# Altium PCB Headstage_Mainboard.PcbDoc
Units mil, origin at the board's own origin, x right, y up, seen from the top; angles counter-clockwise.
Board outline 4600 x 5400 mil, 4 copper layers (Top Copper Layer, Internal Copper Layer 1, Internal Copper Layer 2, Bottom Copper Layer), stack 62.205 mil thick; 8 components, 96 nets, 220 pads, 19 vias.
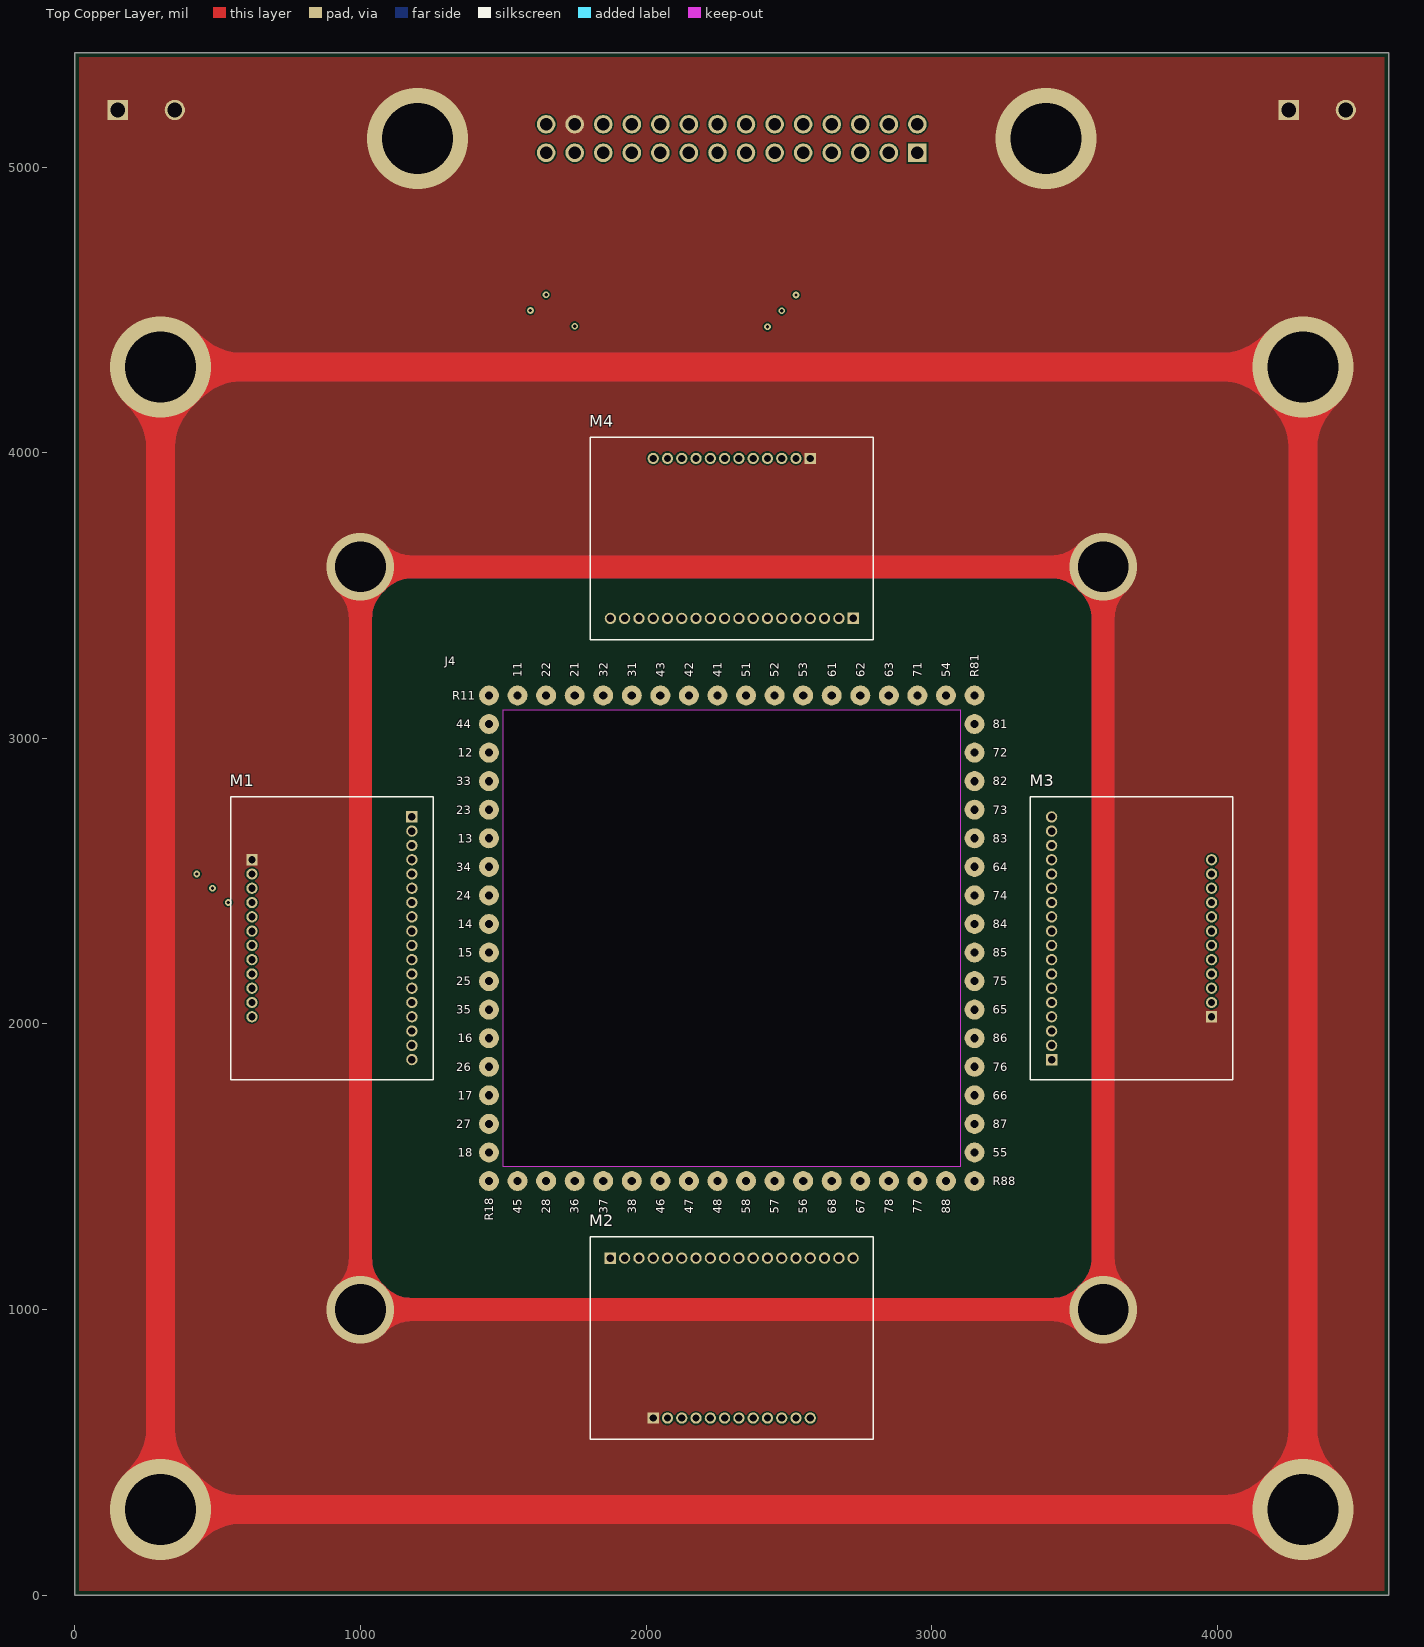
[diagram p0: Top Copper Layer view]
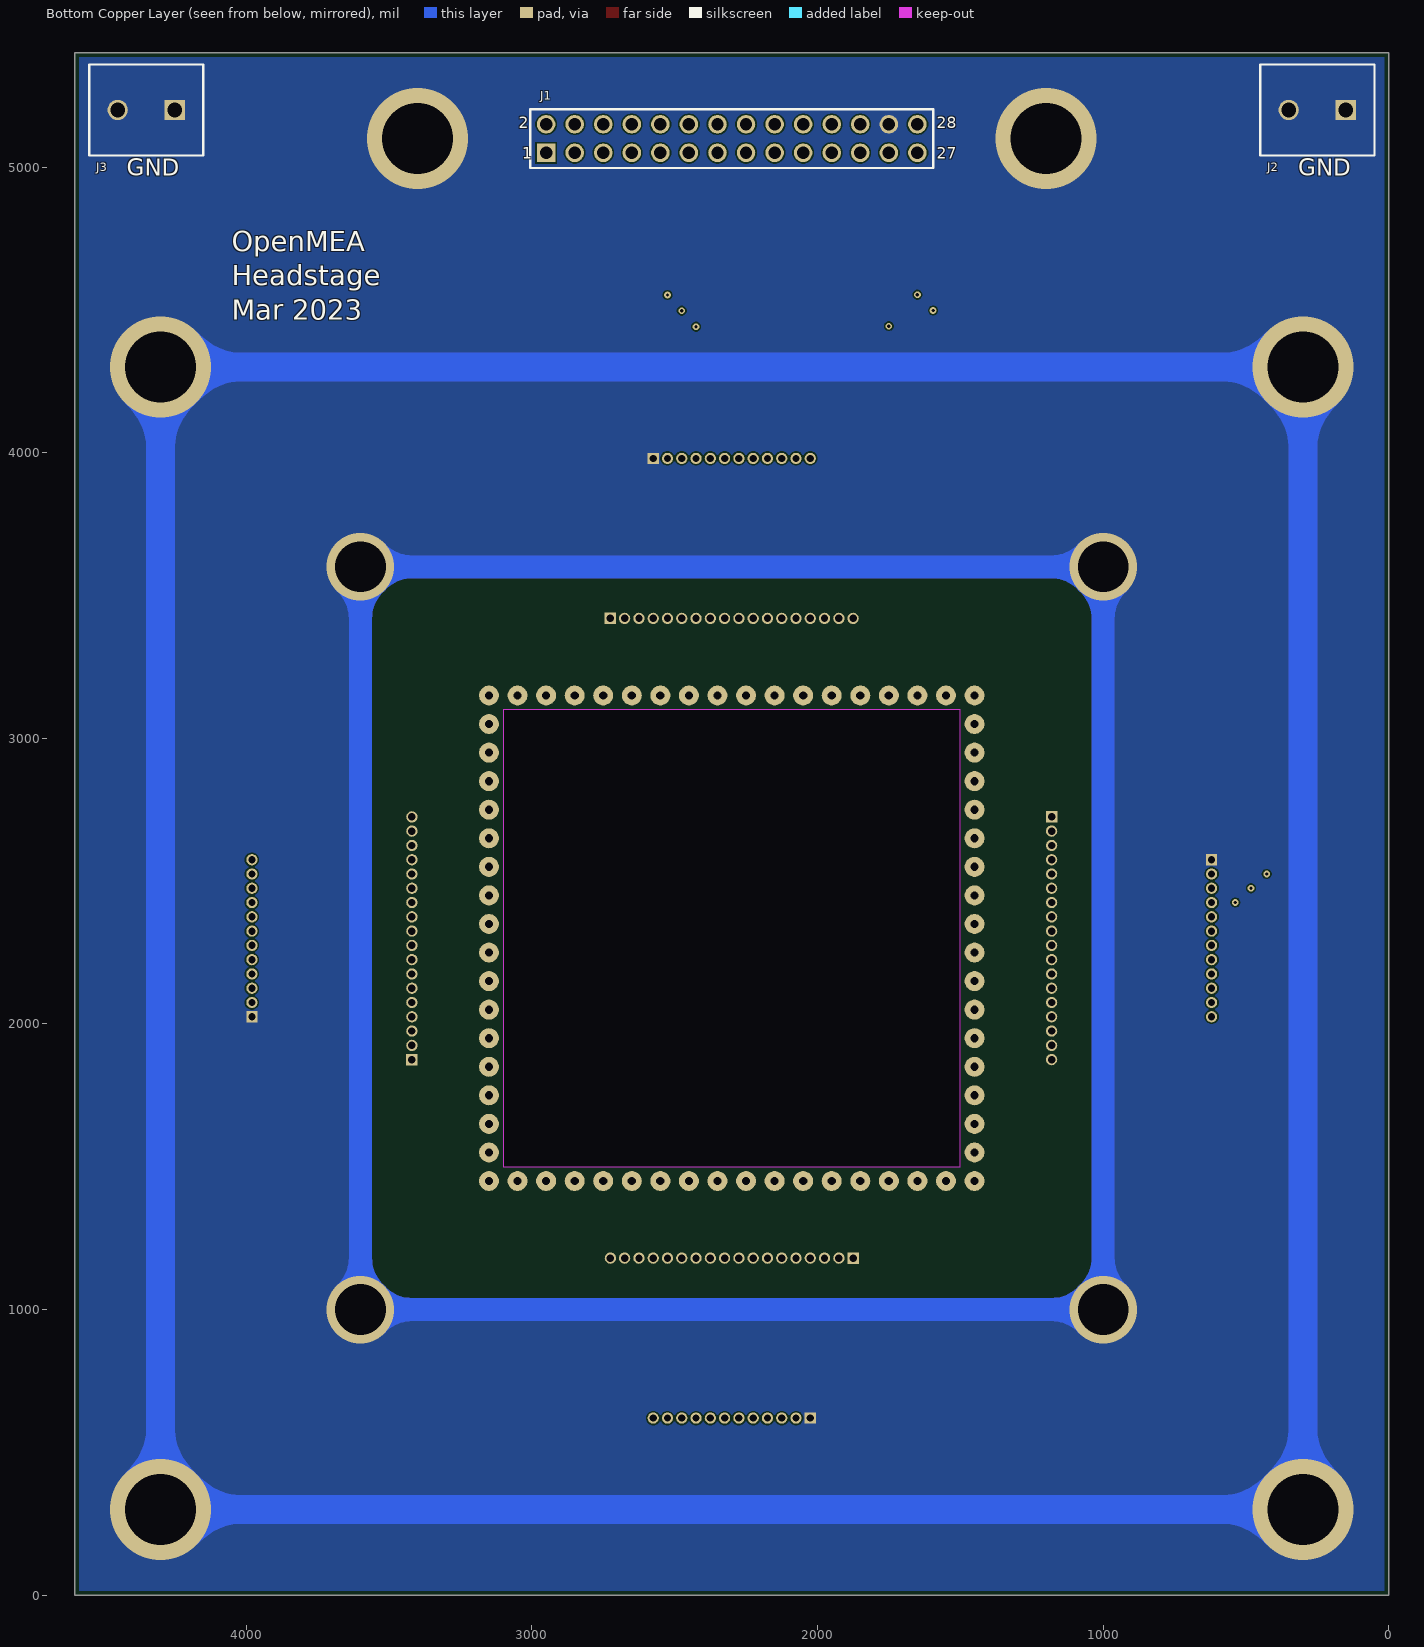
[diagram p1: Bottom Copper Layer view, seen from below]
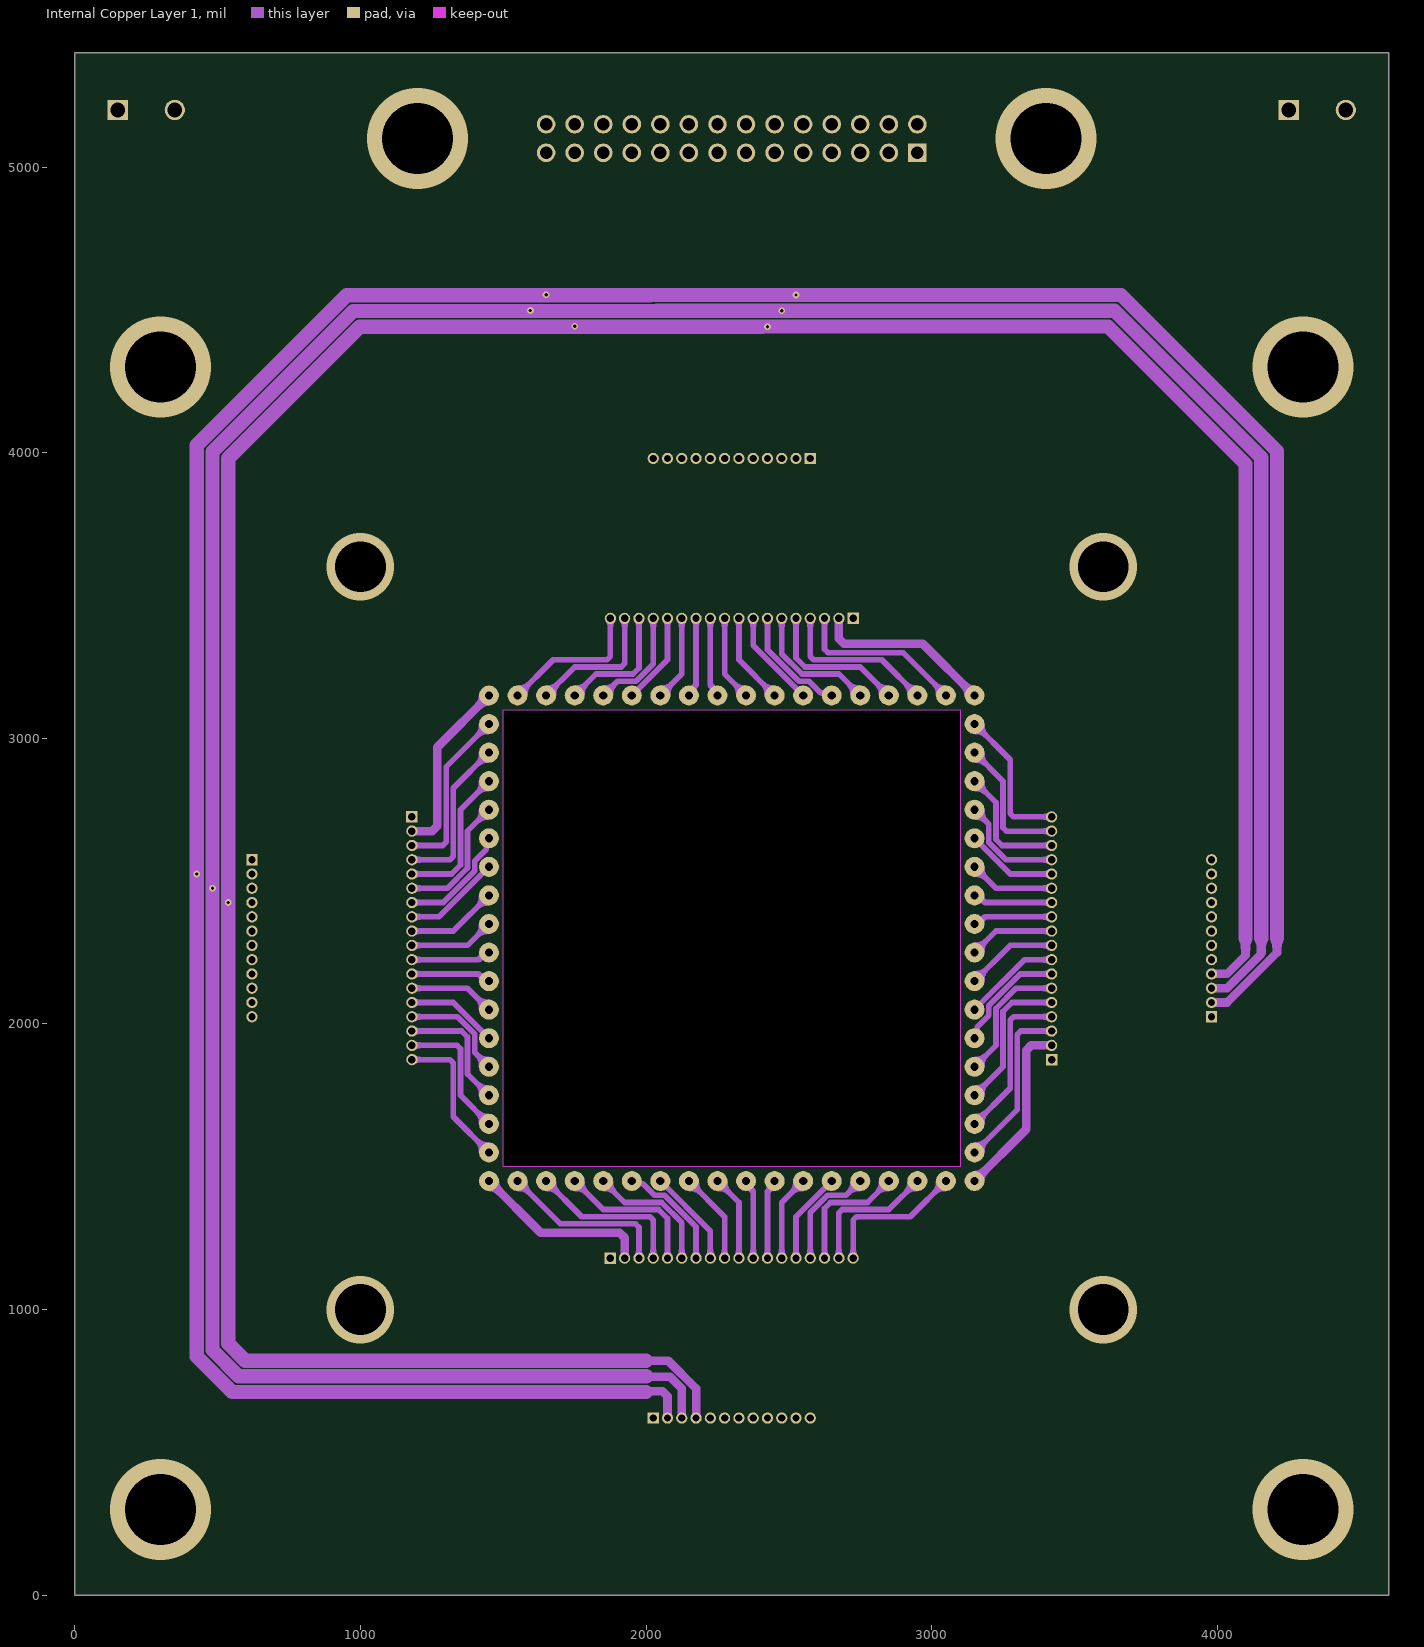
[diagram p2: Internal Copper Layer 1]
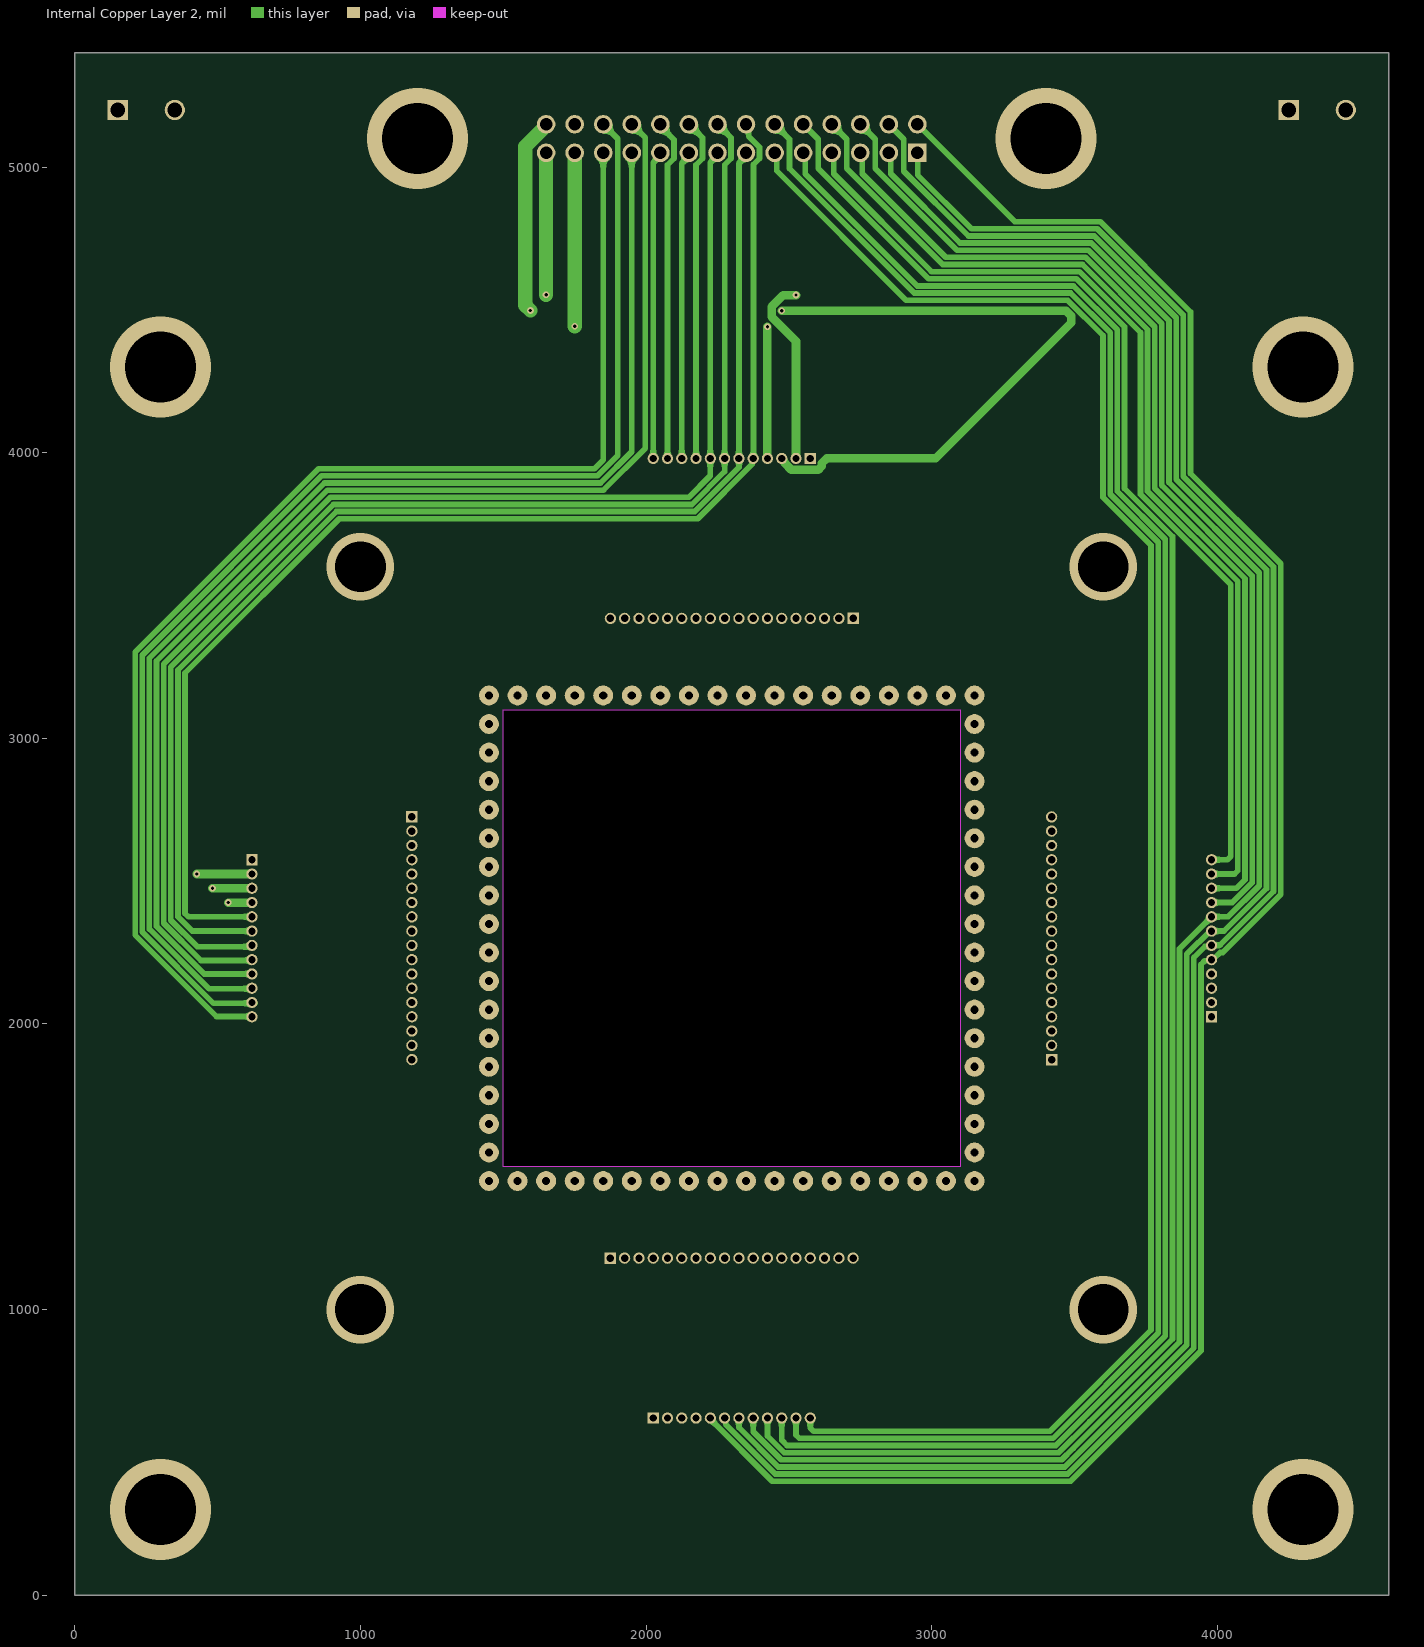
[diagram p3: Internal Copper Layer 2]

## Layer stack, top to bottom
Top Solder: solder mask 0.3937, Solder Resist, Dk 3.5
Top Copper Layer: signal copper 1.378
Dielectric 1: prepreg 8.6614, FR-4, Dk 4.2
Internal Copper Layer 1: signal copper 1.378
Dielectric 2: core 39.3701, FR-4, Dk 4.2
Internal Copper Layer 2: signal copper 1.378
Dielectric 3: prepreg 8.6614, FR-4, Dk 4.2
Bottom Copper Layer: signal copper 1.378
Bottom Solder: solder mask 0.3937, Solder Resist, Dk 3.5

## Board outline
0,0 4600,0 4600,5400 0,5400
cut-out: 1500,3100 3100,3100 3100,1500 1500,1500

## Design rules (kind name [scope] priority, off if disabled: settings)
BoardOutlineClearance [All] p1: gap=15 ignorepadtopadclearanceinfootprint=FALSE
Clearance [All] p1: gap=5 ignorepadtopadclearanceinfootprint=TRUE
ComponentClearance [All] p1: gap=5.91 collisioncheckmode=3 verticalgap=5.91 showdistances=FALSE
HoleSize [All] p1: absolutevalues=TRUE maxlimit=248.03 minlimit=9.84 maxpercent=80.000 minpercent=20.000
HoleToHoleClearance [All] p1: gap=17.72 allowstackedmicrovias=TRUE
MinimumAnnularRing [All] p1: minimumring=5.91
MinimumSolderMaskSliver [All] p1: minsoldermaskwidth=5.9
PlaneClearance [All] p1: clearance=5.91
PlaneConnect [All] p1: planeconnectstyle=Relief reliefexpansion=9.84 reliefentries=4 reliefconductorwidth=5.91 reliefairgap=5.91
PolygonConnect [All] p1: connectstyle=Direct reliefconductorwidth=5.91 reliefentries=4 polygonreliefangle="90 Angle" airgapwidth=5.91
RoomDefinition Headstage_Mainboard [InComponentClass('Headstage_Mainboard')] p1 off: confinementstyle=ConfineIn formatcopy=TRUE lockcomponents=FALSE outline 0,0 2000,0 2000,1000 0,1000
RoutingVias [All] p1: holewidth=9.84 width=21.65 viastyle="Through Hole" minholewidth=9.84 minwidth=21.65 maxholewidth=248.03 maxwidth=354.33
SilkToSilkClearance [All] p1: silktosilkclearance=5
SilkToSolderMaskClearance [IsPad] p1: minsilkscreentomaskgap=7.87 clearancetoexposedcopper=TRUE
SolderMaskExpansion [All] p1: expansion=0 istentingtop=FALSE
Width [All] p1: maxlimit=1968.5 minlimit=5.91 preferedwidth=5.91
22 further rules are at their usual default settings.

## Components (designator, comment, footprint, x,y, rotation, side; value= is the part's Value field where it differs from the comment)
J1 "61302821121" 61302821121 2300,5100 r180 bottom
J2 "1729128" PHOE-1729128-2_V 250,5200 r0 bottom
J3 "1729128" PHOE-1729128-2_V 4350,5200 r0 bottom
J4 "Pogo_Pins_64_4" Pogo_Pins_64_4 2300,2300 r0 top locked
M1 "Neural_Interface_Board" Neural_Interface_Board 900,2300 r270 top locked
M2 "Neural_Interface_Board" Neural_Interface_Board 2300,900 r0 top locked
M3 "Neural_Interface_Board" Neural_Interface_Board 3700,2300 r90 top locked
M4 "Neural_Interface_Board" Neural_Interface_Board 2300,3700 r180 top locked

## Footprints (in the part's own frame and the unit in brackets; to place one, negate y for a bottom-side part, rotate by r counter-clockwise, add the part's x,y. Pads: shape width x height; smd on the part's side, far side on the other; paste and mask are expansions set on the pad)
61302821121 [mm] "Pin Header, pitch 2.54 mm, THT, Vertical, dual row, 28p"
  rect 1.65x1.65 hole 1.1: 1(-16.51,-1.27)
  round 1.65 hole 1.1: 2(-16.51,1.27) 3(-13.97,-1.27) 4(-13.97,1.27) 5(-11.43,-1.27) 6(-11.43,1.27) 7(-8.89,-1.27) 8(-8.89,1.27) 9(-6.35,-1.27) 10(-6.35,1.27) 11(-3.81,-1.27) 12(-3.81,1.27) 13(-1.27,-1.27) 14(-1.27,1.27) 15(1.27,-1.27) 16(1.27,1.27) 17(3.81,-1.27) 18(3.81,1.27) 19(6.35,-1.27) 20(6.35,1.27) 21(8.89,-1.27) 22(8.89,1.27) 23(11.43,-1.27) 24(11.43,1.27) 25(13.97,-1.27) 26(13.97,1.27) 27(16.51,-1.27) 28(16.51,1.27)
  silkscreen extent -17.93,-2.62 17.93,2.62, body extent -17.78,-2.54 17.78,2.54, height 8.59
Neural_Interface_Board [mm]
  rect 1x1 hole 0.65: 1(-6.985,-7.112) 13(-10.795,7.112)
  round 1 hole 0.65: 2(-5.715,-7.112) 3(-4.445,-7.112) 4(-3.175,-7.112) 5(-1.905,-7.112) 6(-0.635,-7.112) 7(0.635,-7.112) 8(1.905,-7.112) 9(3.175,-7.112) 10(4.445,-7.112) 11(5.715,-7.112) 12(6.985,-7.112) 14(-9.525,7.112) 15(-8.255,7.112) 16(-6.985,7.112) 17(-5.715,7.112) 18(-4.445,7.112) 19(-3.175,7.112) 20(-1.905,7.112) 21(-0.635,7.112) 22(0.635,7.112) 23(1.905,7.112) 24(3.175,7.112) 25(4.445,7.112) 26(5.715,7.112) 27(6.985,7.112) 28(8.255,7.112) 29(9.525,7.112) 30(10.795,7.112)
  silkscreen extent -12.6,-9 12.6,9, body extent -12.07,-8.51 12.07,8.51, height 3.9
PHOE-1729128-2_V [mm] "Receptacle, 2-Leads, Body 8.1x10.16mm, Pitch 5.08mm"
  rect 1.8x1.8 hole 1.3: 1(-2.54,0)
  round 1.8 hole 1.3: 2(2.54,0)
  silkscreen extent -5.08,-4.05 5.08,4.05, body extent -5.65,-4.05 5.08,4.05, height 10.01
Pogo_Pins_64_4 [mil]
  round 70 hole 29: 11(-750,850) 12(-850,650) 13(-850,350) 14(-850,50) 15(-850,-50) 16(-850,-350) 17(-850,-550) 18(-850,-750) 21(-550,850) 22(-650,850) 23(-850,450) 24(-850,150) 25(-850,-150) 26(-850,-450) 27(-850,-650) 28(-650,-850) 31(-350,850) 32(-450,850) 33(-850,550) 34(-850,250) 35(-850,-250) 36(-550,-850) 37(-450,-850) 38(-350,-850) 41(-50,850) 42(-150,850) 43(-250,850) 44(-850,750) 45(-750,-850) 46(-250,-850) 47(-150,-850) 48(-50,-850) 51(50,850) 52(150,850) 53(250,850) 54(750,850) 55(850,-750) 56(250,-850) 57(150,-850) 58(50,-850) 61(350,850) 62(450,850) 63(550,850) 64(850,250) 65(850,-250) 66(850,-550) 67(450,-850) 68(350,-850) 71(650,850) 72(850,650) 73(850,450) 74(850,150) 75(850,-150) 76(850,-450) 77(650,-850) 78(550,-850) 81(850,750) 82(850,550) 83(850,350) 84(850,50) 85(850,-50) 86(850,-350) 87(850,-650) 88(750,-850) R11(-850,850) R18(-850,-850) R81(850,850) R88(850,-850)
  body extent -886,-886 886,886, height 303

## Part data
J1: library part CMP-1502-01115-1, "THT Vertical Pin Header WR-PHD, Pitch 2.54 mm, Dual Row, 28 pins", Contact Resistance=20mOhm, Manufacturer="Wurth Elektronik", Operating Temperature=-40to105degC, Rated Current=3A, Withstanding Voltage=500VAC, Working Voltage=250VAC, Datasheet URL=https://katalog.we-online.de/em/datasheet/6130xx21121.pdf, Gender=Male, Manufacturer URL=http://www.we-online.de, Mounting Technology=THT, Orientation=Vertical, Package Reference=61302821121, Packaging=Bag, Part Number=61302821121, Pin Number=28, Pitch=2.54mm, Publisher=WurthElektronik, Row Number=Dual
J2 J3: library part CMP-2000-05815-1, "PCB Terminal Block, 13.5 A, 400 V, 2-Pin THD, RoHS, Bulk", Current Rating=13500mA, Manufacturer="Phoenix Contact", Package Description="2-Pin Through Hole Device, Body 8.1 x 10.16 mm, Pitch 5.08 mm", Package Reference=1729128-2, Package Version=03/2015, Voltage Rating=400V, Datasheet URL=https://datasheet.ciiva.com/16046/1729128-16046181.pdf, Datasheet Version=12/2013, Manufacturer URL=http://www.phoenixcontact.com/, Mounting Technology=ThroughHole, No. of Positions=2, No. of Rows=1, Orientation=Horizontal, Package URL=https://www.phoenixcontact.com/online/portal/pi/pxc/product_detail_page/!ut/p/b1/3VdJjqNKFDxLH8AFycySyWY2ozFsEPOMMQaDOX1XedGL_1Vdm5YXJleknhSKeBkvI6EA8ncAo3AYoDhBQGco6KN7VURTdemj9us_IEKEZo_YHiPAEWEFmDGOHMORkqKYCORBZxgL7ZoaZYcbFFUZ3fqxSY6GOuxydWUuHqz1ynmMFygu583Bob0Ewr6Sd_l-5m-kAueHiB0jpRwZwe58wwtkpxtMYd_LmGcDRU02dRNEyWt6Y2ti5pSyJ_reIkzIulrqApdnbT11V5jnCKbYNCvhEM1MCpPByat_X379-iThf08CI5GfOPqfBeS3BRoBOdD55AKVv0iLwCMq-2BrzXWSGRH7pUGD9uwXQjiph3xL0DKQwdGa0JImiIOmBNOestqgwTHSSs2oOep-78apyXQBvNi8ZLaFjvjWvcaUEBu0MC6Wbe-d6mB0FAebo2lUWinqYaZs5DAYzV0RP9yitUjnGJ0iI9xhZkT42OCQNUJJhkgWINNQLP2JFP6OpMg3JCVg70jqHT0lvKOnhHf0lPuOnnLf0VPuWx6_dxwUIvwk5WMkT0kLL1mh61l2yZVSzG3pYV_bqo-mj6uMKwKwdnnW8Jh5RTOJzMOA5c-eJDaZQw4mTMPH02PvS_ZAqNVjVTo2WyYLkwH_KU1mmmG5kjRhDqPXLwwVHvVOjCM60-fpXvTDfMGW1PVFVS1r4e4yVDk4ZdNbkUHvqPqQSeian4UD39fNKmachqdJ1NJbyk8rXT9mXTvPk3oE5meulKGgiruPJek-4I9hTT6G8ZLOyRSm2RRVbThERQad5OS28hdt4YW4vG0stgYYzsWsK4_7y6DZMjJSCqri1kyiZR5vD7pwIrNR7QwPHTcLTI5qT7eRlpHrdGiupYlqQDJ7zy_CND8fWWBoLRXxk1RVcXiBQwbTD4Xi7KL-FuO94t9xaqweXzH, Packing=Bulk, PartNumber=1729128, Pitch=5.08mm, RoHS=TRUE
J4: "Pogo pins, 64 recording electrodes, 4 reference electrodes"

## Via types
v1: diameter 23.62, hole 11.81, Top Copper Layer to Bottom Copper Layer, tented both sides, 9 vias
v2: diameter 354.33, hole 248.03, Top Copper Layer to Bottom Copper Layer, 6 vias
v3: diameter 236.22, hole 177.17, Top Copper Layer to Bottom Copper Layer, 4 vias

## Nets (pads, with @x,y where several pads share a name; then routed paths per layer and width w, separated by ;. In a path a pad name is that pad's centre, name@x,y a point inside that pad or via, vN(x,y) a via of type N, cw(c..) or ccw(c..) an arc to the next point about the centre after c; other vN are vias at no path point)
E1_0: J4.44 M1.15 | length 600.3
  Internal Copper Layer 1 w20: M1.15 1288.28,2625 1300,2636.72 1300,2900 J4.44
E1_1: J4.12 M1.16 | length 564.9
  Internal Copper Layer 1 w20: M1.16 1313.28,2575 1325,2586.72 1325,2825 J4.12
E1_2: J4.33 M1.17 | length 518.2
  Internal Copper Layer 1 w20: M1.17 1318.93,2525 1350,2556.07 1350,2750 J4.33
E1_3: J4.23 M1.18 | length 459.6
  Internal Copper Layer 1 w20: M1.18 1304.29,2475 1375,2545.71 1375,2675 J4.23
E1_4: J4.13 M1.19 | length 401.1
  Internal Copper Layer 1 w20: M1.19 1289.64,2425 1400,2535.36 1400,2570.71 1440.43,2611.14 1440.43,2640.43 J4.13
E1_5: J4.34 M1.20 | length 342.5
  Internal Copper Layer 1 w20: M1.20 1275,2375 J4.34
E1_6: J4.24 M1.21 | length 321.8
  Internal Copper Layer 1 w20: M1.21 1325,2325 J4.24
E1_7: J4.14 M1.22 | length 301.1
  Internal Copper Layer 1 w20: M1.22 1375,2275 J4.14
E1_8: J4.15 M1.23 | length 280.4
  Internal Copper Layer 1 w20: M1.23 1413.28,2225 1438.28,2250 J4.15
E1_9: J4.25 M1.24 | length 280.4
  Internal Copper Layer 1 w20: M1.24 1412.28,2175 1437.28,2150 J4.25
E1_10: J4.35 M1.25 | length 301.1
  Internal Copper Layer 1 w20: M1.25 1375,2125 J4.35
E1_11: J4.16 M1.26 | length 321.8
  Internal Copper Layer 1 w20: M1.26 1325,2075 J4.16
E1_12: J4.26 M1.27 | length 380.4
  Internal Copper Layer 1 w20: M1.27 1339.64,2025 1400,1964.64 1400,1900 J4.26
E1_13: J4.17 M1.28 | length 438.9
  Internal Copper Layer 1 w20: M1.28 1354.29,1975 1375,1954.29 1375,1825 J4.17
E1_14: J4.27 M1.29 | length 479.6
  Internal Copper Layer 1 w20: M1.29 1338.28,1925 1350,1913.28 1350,1750 J4.27
E1_15: J4.18 M1.30 | length 514.9
  Internal Copper Layer 1 w20: M1.30 1313.28,1875 1325,1863.28 1325,1675 J4.18
E1_REF: J4.R11 M1.14 | length 628.7
  Internal Copper Layer 1 w30: M1.14 1251.43,2675 1269,2692.57 1269,2969 J4.R11
E2_0: J4.45 M2.15 | length 600.3
  Internal Copper Layer 1 w20: J4.45 1700,1300 1963.28,1300 1975,1288.28 M2.15
E2_1: J4.28 M2.16 | length 564.9
  Internal Copper Layer 1 w20: J4.28 1775,1325 2013.28,1325 2025,1313.28 M2.16
E2_2: J4.36 M2.17 | length 518.2
  Internal Copper Layer 1 w20: J4.36 1850,1350 2043.93,1350 2075,1318.93 M2.17
E2_3: J4.37 M2.18 | length 459.6
  Internal Copper Layer 1 w20: J4.37 1925,1375 2054.29,1375 2125,1304.29 M2.18
E2_4: J4.38 M2.19 | length 401.1
  Internal Copper Layer 1 w20: J4.38 1959.57,1440.43 1988.86,1440.43 2029.29,1400 2064.64,1400 2175,1289.64 M2.19
E2_5: J4.46 M2.20 | length 342.5
  Internal Copper Layer 1 w20: J4.46 2225,1275 M2.20
E2_6: J4.47 M2.21 | length 321.8
  Internal Copper Layer 1 w20: J4.47 2275,1325 M2.21
E2_7: J4.48 M2.22 | length 301.1
  Internal Copper Layer 1 w20: J4.48 2325,1375 M2.22
E2_8: J4.58 M2.23 | length 280.4
  Internal Copper Layer 1 w20: J4.58 2350,1438.28 2375,1413.28 M2.23
E2_9: J4.57 M2.24 | length 280.4
  Internal Copper Layer 1 w20: M2.24 2425,1412.28 2450,1437.28 J4.57
E2_10: J4.56 M2.25 | length 301.1
  Internal Copper Layer 1 w20: M2.25 2475,1375 J4.56
E2_11: J4.68 M2.26 | length 321.8
  Internal Copper Layer 1 w20: M2.26 2525,1325 J4.68
E2_12: J4.67 M2.27 | length 380.4
  Internal Copper Layer 1 w20: M2.27 2575,1339.64 2635.36,1400 2700,1400 J4.67
E2_13: J4.78 M2.28 | length 438.9
  Internal Copper Layer 1 w20: M2.28 2625,1354.29 2645.71,1375 2775,1375 J4.78
E2_14: J4.77 M2.29 | length 479.6
  Internal Copper Layer 1 w20: M2.29 2675,1338.28 2686.72,1350 2850,1350 J4.77
E2_15: J4.88 M2.30 | length 514.9
  Internal Copper Layer 1 w20: M2.30 2725,1313.28 2736.72,1325 2925,1325 J4.88
E2_REF: J4.R18 M2.14 | length 628.7
  Internal Copper Layer 1 w30: J4.R18 1631,1269 1907.43,1269 1925,1251.43 M2.14
E3_0: J4.55 M3.15 | length 600.3
  Internal Copper Layer 1 w20: J4.55 3300,1700 3300,1963.28 3311.72,1975 M3.15
E3_1: J4.87 M3.16 | length 564.9
  Internal Copper Layer 1 w20: J4.87 3275,1775 3275,2013.28 3286.72,2025 M3.16
E3_2: J4.66 M3.17 | length 518.2
  Internal Copper Layer 1 w20: J4.66 3250,1850 3250,2043.93 3281.07,2075 M3.17
E3_3: J4.76 M3.18 | length 459.6
  Internal Copper Layer 1 w20: J4.76 3225,1925 3225,2054.29 3295.71,2125 M3.18
E3_4: J4.86 M3.19 | length 401.1
  Internal Copper Layer 1 w20: J4.86 3159.57,1959.57 3159.57,1988.86 3200,2029.29 3200,2064.64 3310.36,2175 M3.19
E3_5: J4.65 M3.20 | length 342.5
  Internal Copper Layer 1 w20: J4.65 3325,2225 M3.20
E3_6: J4.75 M3.21 | length 321.8
  Internal Copper Layer 1 w20: J4.75 3275,2275 M3.21
E3_7: J4.85 M3.22 | length 301.1
  Internal Copper Layer 1 w20: J4.85 3225,2325 M3.22
E3_8: J4.84 M3.23 | length 280.4
  Internal Copper Layer 1 w20: J4.84 3161.72,2350 3186.72,2375 M3.23
E3_9: J4.74 M3.24 | length 280.4
  Internal Copper Layer 1 w20: J4.74 3162.72,2450 3187.72,2425 M3.24
E3_10: J4.64 M3.25 | length 301.1
  Internal Copper Layer 1 w20: J4.64 3225,2475 M3.25
E3_11: J4.83 M3.26 | length 321.8
  Internal Copper Layer 1 w20: J4.83 3275,2525 M3.26
E3_12: J4.73 M3.27 | length 380.4
  Internal Copper Layer 1 w20: J4.73 3200,2700 3200,2635.36 3260.36,2575 M3.27
E3_13: J4.82 M3.28 | length 438.9
  Internal Copper Layer 1 w20: J4.82 3225,2775 3225,2645.71 3245.71,2625 M3.28
E3_14: J4.72 M3.29 | length 479.6
  Internal Copper Layer 1 w20: J4.72 3250,2850 3250,2686.72 3261.72,2675 M3.29
E3_15: J4.81 M3.30 | length 514.9
  Internal Copper Layer 1 w20: J4.81 3275,2925 3275,2736.72 3286.72,2725 M3.30
E3_REF: J4.R88 M3.14 | length 628.7
  Internal Copper Layer 1 w30: J4.R88 3331,1631 3331,1907.43 3348.57,1925 M3.14
E4_0: J4.54 M4.15 | length 600.3
  Internal Copper Layer 1 w20: M4.15 2625,3311.72 2636.72,3300 2900,3300 J4.54
E4_1: J4.71 M4.16 | length 564.9
  Internal Copper Layer 1 w20: M4.16 2575,3286.72 2586.72,3275 2825,3275 J4.71
E4_2: J4.63 M4.17 | length 518.2
  Internal Copper Layer 1 w20: M4.17 2525,3281.07 2556.07,3250 2750,3250 J4.63
E4_3: J4.62 M4.18 | length 459.6
  Internal Copper Layer 1 w20: M4.18 2475,3295.71 2545.71,3225 2675,3225 J4.62
E4_4: J4.61 M4.19 | length 401.1
  Internal Copper Layer 1 w20: M4.19 2425,3310.36 2535.36,3200 2570.71,3200 2611.14,3159.57 2640.43,3159.57 J4.61
E4_5: J4.53 M4.20 | length 342.5
  Internal Copper Layer 1 w20: M4.20 2375,3325 J4.53
E4_6: J4.52 M4.21 | length 321.8
  Internal Copper Layer 1 w20: M4.21 2325,3275 J4.52
E4_7: J4.51 M4.22 | length 301.1
  Internal Copper Layer 1 w20: M4.22 2275,3225 J4.51
E4_8: J4.41 M4.23 | length 280.4
  Internal Copper Layer 1 w20: M4.23 2225,3186.72 2250,3161.72 J4.41
E4_9: J4.42 M4.24 | length 280.4
  Internal Copper Layer 1 w20: J4.42 2150,3162.72 2175,3187.72 M4.24
E4_10: J4.43 M4.25 | length 301.1
  Internal Copper Layer 1 w20: J4.43 2125,3225 M4.25
E4_11: J4.31 M4.26 | length 321.8
  Internal Copper Layer 1 w20: J4.31 2075,3275 M4.26
E4_12: J4.32 M4.27 | length 380.4
  Internal Copper Layer 1 w20: J4.32 1900,3200 1964.64,3200 2025,3260.36 M4.27
E4_13: J4.21 M4.28 | length 438.9
  Internal Copper Layer 1 w20: J4.21 1825,3225 1954.29,3225 1975,3245.71 M4.28
E4_14: J4.22 M4.29 | length 479.6
  Internal Copper Layer 1 w20: J4.22 1750,3250 1913.28,3250 1925,3261.72 M4.29
E4_15: J4.11 M4.30 | length 514.9
  Internal Copper Layer 1 w20: J4.11 1675,3275 1863.28,3275 1875,3286.72 M4.30
E4_REF: J4.R81 M4.14 | length 628.7
  Internal Copper Layer 1 w30: M4.14 2675,3348.57 2692.57,3331 2969,3331 J4.R81
GND: J1.26 J2.1 J2.2 J3.1 J3.2 M1.1 M2.1 M3.1 M4.1 | length 52800
  Top Copper Layer w80: v3(1000,1000) v3(1000,3600) v3(3600,3600) v3(3600,1000) v3(1000,1000)
  Top Copper Layer w100: v2(300,300) v2(300,4300) v2(4300,4300) v2(4300,300) v2(300,300)
  Bottom Copper Layer w80: v3(1000,1000) v3(1000,3600) v3(3600,3600) v3(3600,1000) v3(1000,1000)
  Bottom Copper Layer w100: v2(300,300) v2(300,4300) v2(4300,4300) v2(4300,300) v2(300,300)
  other v2: 1200,5100 3400,5100
M1_MISON: J1.24 M1.11 | length 4604.1
  Internal Copper Layer 2 w20: M1.11@631.48,2072 485.58,2072 236,2321.58 236,3291.13 863.87,3919 1830.05,3919 1901,3989.95 1901,5099 J1.24
M1_MISOP: J1.23 M1.12 | length 4511.2
  Internal Copper Layer 2 w20: M1.12@620.37,2026 496.22,2026 211,2311.22 211,3301.49 853.51,3944 1819.7,3944 1850,3974.3 J1.23
M1_MOSIN: J1.22 M1.9 | length 4506.3
  Internal Copper Layer 2 w20: M1.9@620.76,2175 453.29,2175 286,2342.29 286,3270.42 884.58,3869 1850.76,3869 1997.48,4015.72 1997.48,5102.52 J1.22
M1_MOSIP: J1.21 M1.10 | length 4432.6
  Internal Copper Layer 2 w20: M1.10@623.54,2123 469.93,2123 261,2331.93 261,3280.78 874.22,3894 1840.41,3894 1949.59,4003.18 J1.21@1949.59,5050
M2_MISON: J1.12 M2.11 | length 6594.3
  Internal Copper Layer 2 w20: J1.12 2502.52,5097.48 2502.52,4995.34 2938.83,4559.02 3486.43,4559.02 3625.07,4420.38 3625.07,3854.29 3793,3686.36 3793,3628 3793,917.64 3424.36,549 2554.71,549 2536.72,549 2525,560.72 M2.11
M2_MISOP: J1.11 M2.12 | length 6377.9
  Internal Copper Layer 2 w20: J1.11 2457.1,5042.9 2457.1,4987.52 2910.6,4534.02 3476.07,4534.02 3600.07,4410.03 3600.07,3843.93 3768,3676 3768,928 3414,574 2586.72,574 2575,585.72 M2.12
M2_MOSIN: J1.10 M2.9 | length 6761.9
  Internal Copper Layer 2 w20: M2.9 2425,557.42 2483.42,499 2534,499 3445.07,499 3552.07,606 3843,896.93 3843,3707.07 3675.07,3875 3675.07,4441.09 3507.14,4609.02 2988.83,4609.02 2602.52,4995.34 2602.52,5097.48 J1.10
M2_MOSIP: J1.9 M2.10 | length 6575.5
  Internal Copper Layer 2 w20: M2.10 2475,542.78 2493.78,524 2544.35,524 3434.71,524 3818,907.29 3818,3696.71 3650.07,3864.64 3650.07,4430.74 3496.78,4584.02 2949.19,4584.02 2556.85,4976.36 2556.85,5043.15 J1.9
M3_MISON: J1.8 M3.11 | length 3585.6
  Internal Copper Layer 2 w20: J1.8 2702.52,5097.48 2702.52,5069.67 2702.52,4995.34 3038.83,4659.02 3527.85,4659.02 3755.98,4430.89 3755.98,3864.8 4072,3548.78 4072,2536.72 4060.28,2525 M3.11
M3_MISOP: J1.7 M3.12 | length 3417.4
  Internal Copper Layer 2 w20: J1.7 2656.85,5043.15 2656.85,4976.36 2999.19,4634.02 3517.49,4634.02 3730.98,4420.54 3730.98,3854.44 4047,3538.42 4047,2586.72 4035.28,2575 M3.12
M3_MOSIN: J1.6 M3.9 | length 3663.9
  Internal Copper Layer 2 w20: J1.6 2802.52,5097.48 2802.52,4995.34 3088.83,4709.02 3548.56,4709.02 3805.98,4451.6 3805.98,3885.51 4122,3569.49 4122,2494.42 4052.58,2425 M3.9
M3_MOSIP: J1.5 M3.10 | length 3519
  Internal Copper Layer 2 w20: J1.5 2756.85,5043.15 2756.85,4976.36 3049.19,4684.02 3538.2,4684.02 3780.98,4441.25 3780.98,3875.15 4097,3559.13 4097,2504.78 4067.22,2475 M3.10
M4_MISON: J1.20 M4.11 | length 1199
  Internal Copper Layer 2 w20: J1.20 2050,5143.38 2097.48,5095.9 2097.48,5030.33 2075,5007.85 M4.11
M4_MISOP: J1.19 M4.12 | length 1080.4
  Internal Copper Layer 2 w20: M4.12 2025,5015.8 2050,5040.8 J1.19
M4_MOSIN: J1.18 M4.9 | length 1199
  Internal Copper Layer 2 w20: J1.18 2197.48,5102.52 2197.48,5030.33 2175,5007.85 M4.9
M4_MOSIP: J1.17 M4.10 | length 1080.4
  Internal Copper Layer 2 w20: M4.10 2125,5012.83 2150,5037.83 J1.17
M14_CSN: J1.14 M1.5 M4.5 | length 4589.7
  Internal Copper Layer 2 w20: M1.5 397.72,2375 386,2386.72 386,3229 926,3769 2181,3769 2371.29,3959.29 2371.29,3976.29 M4.5 ; J1.14 2358.6,5141.4 2358.6,5116.26 2359.06,5115.8 2359.06,5108.09 2397.48,5069.67 2397.48,5030.33 2376,5008.85 M4.5@2376,3980
M14_CSP: J1.13 M1.6 M4.6 | length 4514.3
  Internal Copper Layer 2 w20: M1.6 411,2325 361,2375 361,3239.36 915.64,3794 2170.64,3794 2325.69,3949.05 2325.69,3979.31 M4.6 2325,5012.83 2350,5037.83 J1.13
M14_SCLKN: J1.16 M1.7 M4.7 | length 4678.9
  Internal Copper Layer 2 w20: M1.7 616.29,2271.29 602.6,2271.29 601.3,2270 429,2270 336,2363 336,3249.71 905.29,3819 2160.29,3819 2275,3933.71 2275,5007.85 2297.48,5030.33 2297.48,5102.52 J1.16
M14_SCLKP: J1.15 M1.8 M4.8 | length 4597.7
  Internal Copper Layer 2 w20: M1.8@618.93,2222 441.64,2222 311,2352.64 311,3260.07 894.93,3844 2149.93,3844 2225,3919.07 M4.8 2225,5015.8 2250,5040.8 J1.15
M23_CSN: J1.2 M2.5 M3.5 | length 7128.4
  Internal Copper Layer 2 w20: M2.5@2224.43,616.57 2442,399 3486.49,399 3943,855.51 3943,2208.3 3955.99,2221.29 3976.29,2221.29 M3.5 ; J1.2 3290.95,4809.05 3589.96,4809.05 3905.98,4493.02 3905.98,3926.93 4222,3610.91 4222,2453 4019.25,2250.25 4010.49,2250.25 3988.95,2228.71 M3.5@3980,2228.71
M23_CSP: J1.1 M2.6 M3.6 | length 7019.8
  Internal Copper Layer 2 w20: M2.6 2278.71,616.29 2278.71,597.65 2452.36,424 3476.13,424 3918,865.87 3918,2232.84 3956.46,2271.29 3975.48,2271.29 M3.6@3980,2275.81 ; J1.1 2950.76,5049.24 2950.76,4972.64 3139.38,4784.02 3579.63,4784.02 3880.98,4482.67 3880.98,3916.57 4197,3600.55 4197,2463.36 4009.45,2275.81 M3.6@3980.81,2275.81
M23_SCLKN: J1.4 M2.7 M3.7 | length 7053.5
  Internal Copper Layer 2 w20: M2.7 2325,586.71 2462.71,449 3465.78,449 3893,876.22 3893,2245 3934.3,2286.3 3936.11,2286.3 3971.08,2321.27 3973.42,2321.27 M3.7@3974.84,2319.84 ; J1.4 2902.52,5097.48 2902.52,4985.53 3129.03,4759.02 3569.27,4759.02 3855.98,4472.31 3855.98,3906.22 4172,3590.2 4172,2473.71 4023.29,2325 M3.7
M23_SCLKP: J1.3 M2.8 M3.8 | length 6870.5
  Internal Copper Layer 2 w20: M2.8 2375,572.07 2473.07,474 3455.42,474 3494.42,513 3868,886.58 3868,2263 M3.8@3979,2374 ; J1.3 2856.85,5043.15 2856.85,4976.36 3099.19,4734.02 3558.91,4734.02 3830.98,4461.96 3830.98,3895.86 4147,3579.84 4147,2484.07 4037.93,2375 M3.8
VDD: J1.25 M1.4 M2.4 M3.4 M4.4 | length 11875.5
  Internal Copper Layer 1 w30: 2001,821 2078,821 2175,724 M2.4 ; M3.4 4034,2175 4099,2240 4099,2300
  Internal Copper Layer 1 w50: 2000,821 597,821 537,881 v1(537,2425) 537,3980.44 997.56,4441 2406,4441 2407,4442 3617.44,4442 4099,3960.44 4099,2300
  Internal Copper Layer 2 w30: v1(537,2425) M1.4 ; M4.4 v1(2425,4441)
  Internal Copper Layer 2 w50: v1(1750,4443) J1.25
VSTIMN: J1.27 M1.2 M2.2 M3.2 M4.2 | length 12620.8
  Internal Copper Layer 1 w30: 1988,714 2057.43,714 2075,696.43 M2.2 ; M3.2 4034,2075 4209,2250 4209,2300
  Internal Copper Layer 1 w50: v1@1650,4551 952,4551 427,4026 v1(427,2525) 427,835.44 551.44,711 2000,711 ; v1@1652,4551 2014.22,4551 2015.22,4552 v1(2525,4552) 3663,4552 4209,4006 ; 4209,2300 4209,4001
  Internal Copper Layer 2 w30: v1(427,2525) M1.2 ; M4.2 2525,4390.5 2440,4475.5 2440,4511.5 2480.5,4552 v1(2525,4552)
  Internal Copper Layer 2 w50: v1(1650,4553) J1.27
VSTIMP: J1.28 M1.3 M2.3 M3.3 M4.3 | length 14124.5
  Internal Copper Layer 1 w30: 1998,765 2084,765 2125,724 M2.3 ; M3.3 4034,2125 4154,2245 4154,2300
  Internal Copper Layer 1 w50: 2000,766 574.22,766 482,858.22 v1(482,2475) 482,4003.22 974.78,4496 2037,4496 ; 2038,4497 v1(2475,4497) 3640.22,4497 4154,3983.22 4154,2300
  Internal Copper Layer 2 w30: v1(482,2475) M1.3 ; M4.3 2475,3977.46 2485.31,3967.15 2485.31,3963.56 2508.56,3940.31 2602.97,3940.31 2614.68,3952.03 2614.68,3962.43 2632.26,3980 3013.67,3980 3488.24,4454.57 3488.24,4479.43 3470.67,4497 v1(2475,4497)
  Internal Copper Layer 2 w50: v1(1595,4498) 1577,4516 1577,5072.39 1642.52,5137.91 1642.52,5138.47 1650,5145.95 J1.28
pads on no net: M1.13 M2.13 M3.13 M4.13

## Polygon pours and split planes (outlines as drawn)
GND on Bottom Copper Layer "GND_L04_P008" (solid, pour order 8): 0,0 4600,0 4600,5400 0,5400
GND on Top Copper Layer "GND_L01_P009" (solid, pour order 9): 4600,0 0,0 0,5400 4600,5400

## Other copper
Top Copper Layer:
  pour cut-out: 1000,1000 1000,3600 3600,3600 3600,1000
Bottom Copper Layer:
  pour cut-out: 1000,1000 1000,3600 3600,3600 3600,1000

## Silkscreen, mask and mechanical layers (free items; w line width, h text height)
Bottom Overlay:
  text "GND" at 317.43,4950.74 h100
  text "GND" at 4417.43,4950.74 h100
  text "OpenMEA" at 4050,4681.33 h120
  text "Headstage" at 4050,4562.55 h120
  text "Mar 2023" at 4050,4441.33 h120

## Text inside footprints (layer, text, board x,y; h text height)
J1: Bottom Overlay "28" at 1581.89,5135.43 h40; Bottom Overlay "27" at 1581.89,5029.13 h40; Bottom Overlay "2" at 3045.67,5135.43 h40; Bottom Overlay "1" at 3033.86,5029.13 h40
J4: Top Overlay "R11" at 1320.97,3135 h30; Top Overlay "R81" at 3164.99,3214.06 h30 r90; Top Overlay "45" at 1565,1335.96 h30 r90; Top Overlay "44" at 1335.96,3035 h30; Top Overlay "12" at 1340.96,2935 h30; Top Overlay "33" at 1335.96,2835 h30; Top Overlay "23" at 1335.96,2735 h30; Top Overlay "13" at 1340.96,2635 h30; Top Overlay "34" at 1335.96,2535 h30; Top Overlay "24" at 1335.96,2435 h30; Top Overlay "14" at 1340.96,2335 h30; Top Overlay "15" at 1340.96,2235 h30; Top Overlay "25" at 1335.96,2135 h30; Top Overlay "35" at 1335.96,2035 h30; Top Overlay "16" at 1340.96,1935 h30; Top Overlay "26" at 1335.96,1835 h30; Top Overlay "17" at 1340.96,1735 h30; Top Overlay "27" at 1335.96,1635 h30; Top Overlay "18" at 1340.96,1535 h30; Top Overlay "81" at 3214.06,3035 h30; Top Overlay "72" at 3214.06,2935 h30; Top Overlay "82" at 3214.06,2835 h30; Top Overlay "73" at 3214.06,2735 h30; Top Overlay "83" at 3214.06,2635 h30; Top Overlay "64" at 3214.06,2535 h30; Top Overlay "74" at 3214.06,2435 h30; Top Overlay "84" at 3214.06,2335 h30; Top Overlay "85" at 3214.06,2235 h30; Top Overlay "75" at 3214.06,2135 h30; Top Overlay "65" at 3214.06,2035 h30; Top Overlay "86" at 3214.06,1935 h30; Top Overlay "76" at 3214.06,1835 h30; Top Overlay "66" at 3214.06,1735 h30; Top Overlay "87" at 3214.06,1635 h30; Top Overlay "28" at 1665,1335.96 h30 r90; Top Overlay "36" at 1765,1335.96 h30 r90; Top Overlay "37" at 1865,1335.96 h30 r90; Top Overlay "38" at 1965,1335.96 h30 r90; Top Overlay "46" at 2065,1335.96 h30 r90; Top Overlay "47" at 2165,1335.96 h30 r90; Top Overlay "48" at 2265,1335.96 h30 r90; Top Overlay "58" at 2365,1335.96 h30 r90; Top Overlay "57" at 2465,1335.96 h30 r90; Top Overlay "56" at 2565,1335.96 h30 r90; Top Overlay "68" at 2665,1335.96 h30 r90; Top Overlay "67" at 2765,1335.96 h30 r90; Top Overlay "78" at 2865,1335.96 h30 r90; Top Overlay "77" at 2965,1335.96 h30 r90; Top Overlay "88" at 3065,1335.96 h30 r90; Top Overlay "11" at 1565,3214.05 h30 r90; Top Overlay "22" at 1665,3214.05 h30 r90; Top Overlay "21" at 1765,3214.05 h30 r90; Top Overlay "32" at 1865,3214.05 h30 r90; Top Overlay "31" at 1965,3214.05 h30 r90; Top Overlay "43" at 2065,3214.05 h30 r90; Top Overlay "42" at 2165,3214.05 h30 r90; Top Overlay "41" at 2265,3214.05 h30 r90; Top Overlay "51" at 2365,3214.06 h30 r90; Top Overlay "52" at 2464.99,3214.06 h30 r90; Top Overlay "53" at 2564.99,3214.06 h30 r90; Top Overlay "61" at 2665,3214.06 h30 r90; Top Overlay "62" at 2764.99,3214.06 h30 r90; Top Overlay "63" at 2864.99,3214.06 h30 r90; Top Overlay "71" at 2964.99,3214.06 h30 r90; Top Overlay "55" at 3214.06,1535 h30; Top Overlay "54" at 3064.99,3214.06 h30 r90; Top Overlay "R88" at 3214.06,1435 h30; Top Overlay "R18" at 1465,1310.97 h30 r90